# Altium PCB level_shifter_pcb.PcbDoc
Units mil, origin at the board's own origin, x right, y up, seen from the top; angles counter-clockwise.
Board outline 920 x 725 mil, 2 copper layers (Top Layer, Bottom Layer); 5 components, 5 nets, 11 pads, 0 vias.
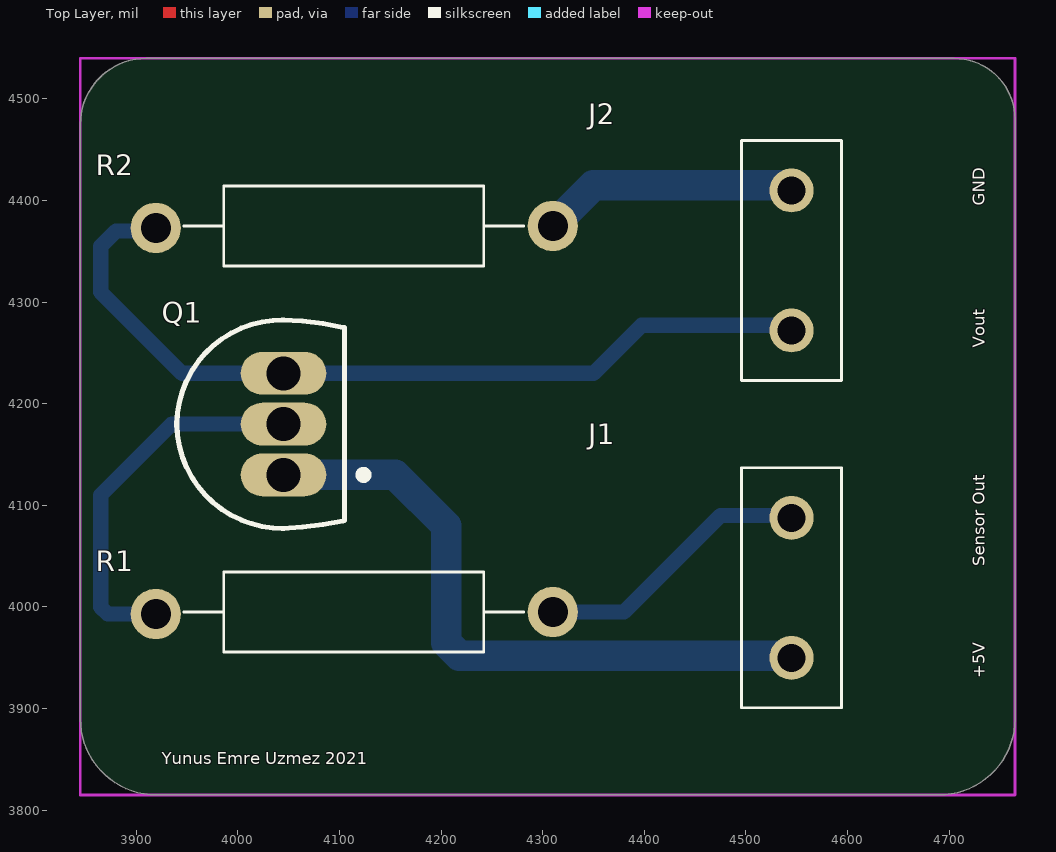
[diagram p0: Top Layer view]
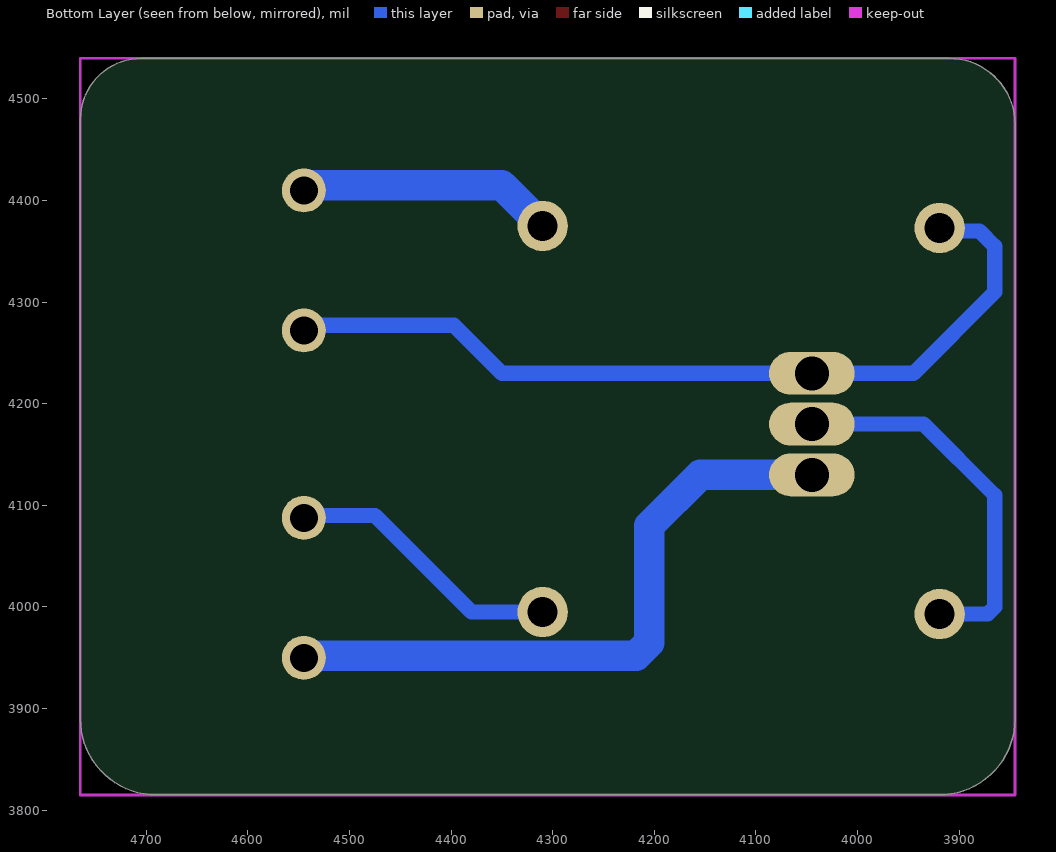
[diagram p1: Bottom Layer view, seen from below]
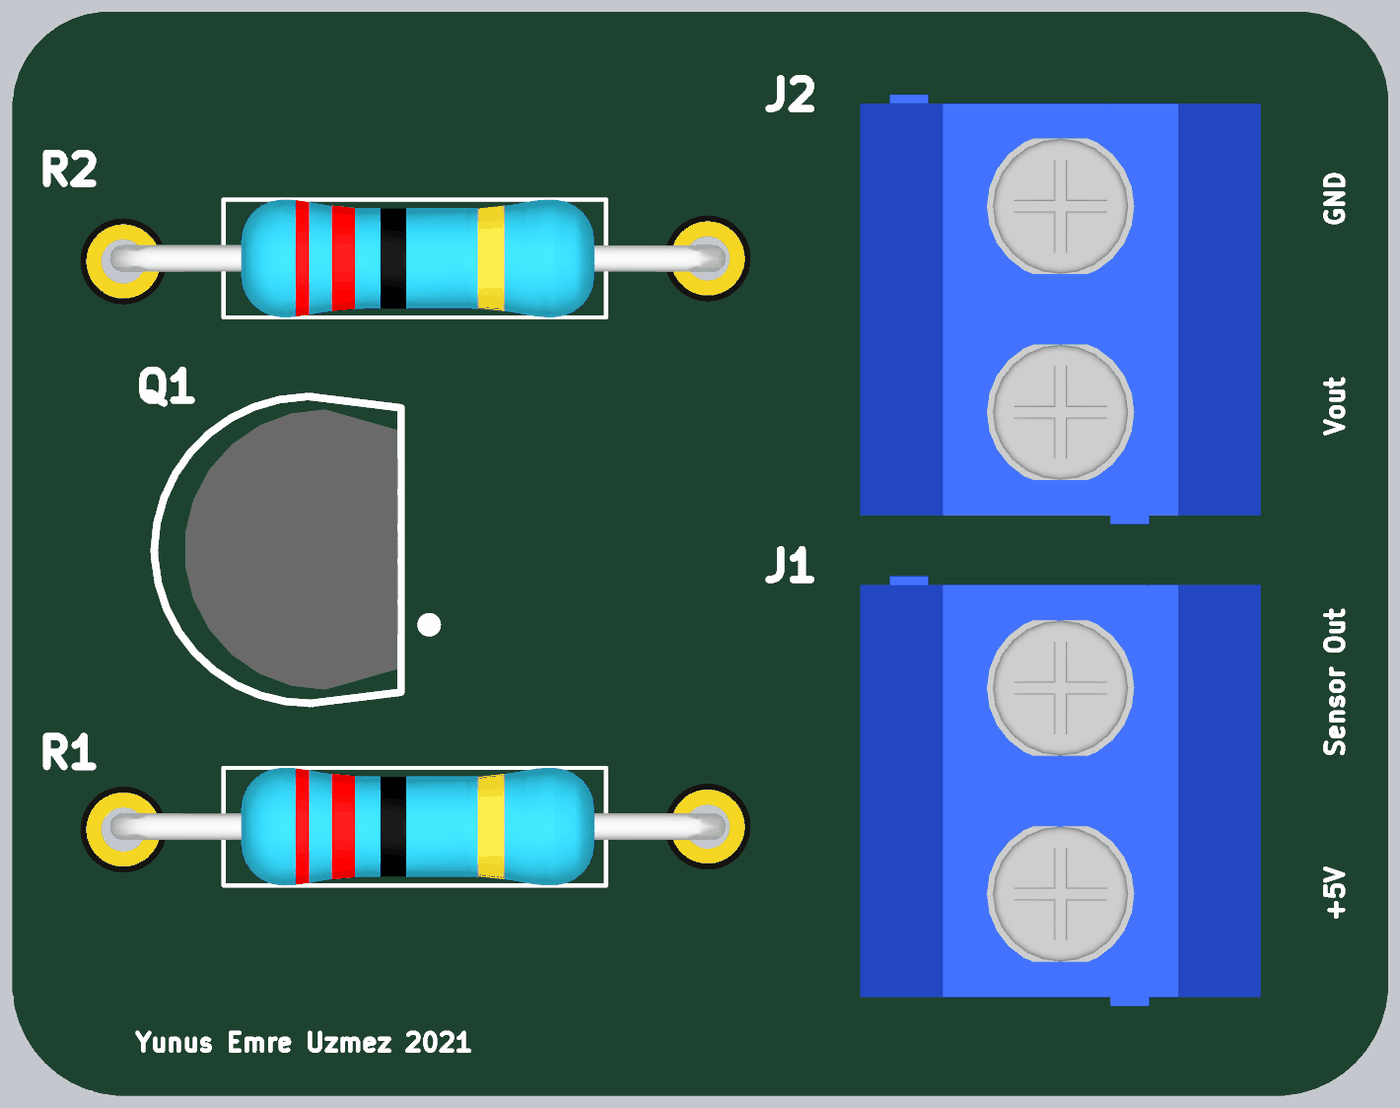
[diagram p2: 3D render of the assembled board from above, using the file's embedded part models]

## Layer stack, top to bottom
Top Solder: solder mask 0.4, Solder Resist, Dk 3.5
Top Layer: signal copper 1.4
Dielectric 1: dielectric 12.6, FR-4, Dk 4.8
Bottom Layer: signal copper 1.4
Bottom Solder: solder mask 0.4, Solder Resist, Dk 3.5

## Board outline
3920,3815 4690,3815 ccw(c4690,3890) 4765,3890 4765,4480 ccw(c4705,4480) 4705,4540 3910,4540 ccw(c3910,4475) 3845,4475 3845,3890 ccw(c3920,3890)

## Design rules (kind name [scope] priority, off if disabled: settings)
Clearance [All] p1: gap=1 ignorepadtopadclearanceinfootprint=FALSE except(0: Arc-Hole Track-Hole SMDPad-Hole THPad-Hole Via-Hole Fill-Hole Poly-Hole Region-Hole Text-Hole)
HoleToHoleClearance [All] p1: gap=0 allowstackedmicrovias=TRUE
PolygonConnect [All] p1: connectstyle=Relief reliefconductorwidth=10 reliefentries=4 polygonreliefangle="90 Angle" airgapwidth=10
RoutingVias [All] p1: holewidth=28 width=50 viastyle="Through Hole" minholewidth=28 minwidth=50 maxholewidth=28 maxwidth=50
SilkToSilkClearance [All] p1: silktosilkclearance=1
SilkToSolderMaskClearance [IsPad] p1: minsilkscreentomaskgap=1 clearancetoexposedcopper=TRUE
SolderMaskExpansion [All] p1: expansion=4
Width [All] p1: maxlimit=100 minlimit=10 preferedwidth=15 minimp=50.000000 maximp=50.000000 favimp=50.000000
27 further rules are at their usual default settings.

## Components (designator, comment, footprint, x,y, rotation, side; value= is the part's Value field where it differs from the comment)
J1 "Terminal Block 1x2" "TERMINAL BLOCK 1X2" 4530.94,4012.8 r90 top
J2 "Terminal Block 1x2" "TERMINAL BLOCK 1X2" 4530.94,4335 r90 top
Q1 "BC327" TO-92-3 4047.36,4180 r90 top
R1 "Resistor 10k" "THT RESISTOR" 4098.74,4116.26 r180 top value=10k
R2 "Resistor 10k" "THT RESISTOR" 4098.74,4496.26 r180 top value=10k

## Footprints (in the part's own frame and the unit in brackets; to place one, negate y for a bottom-side part, rotate by r counter-clockwise, add the part's x,y. Pads: shape width x height; smd on the part's side, far side on the other; paste and mask are expansions set on the pad)
"TERMINAL BLOCK 1X2" [mm]
  round 1.1 hole 0.7: 1(-1.595,-0.357) 2(1.905,-0.357)
  silkscreen extent -2.85,-1.61 3.16,0.89, body extent -3.5,-3.78 3.8,3.02, height 8.4
"THT RESISTOR" [mm]
  round 1.258 hole 0.75: 1(-5.366,3.08) 2(4.559,3.13)
  silkscreen extent -4.64,2.08 3.86,4.08, body extent -5.67,2.08 4.78,4.08, height 2.6
TO-92-3 [mm]
  oval 1.07x2.14 hole 0.85: B(0,0.06) C(1.27,0.06) E(-1.27,0.06)
  silkscreen extent -2.61,-2.04 2.61,2.73, body extent -2.37,-1.41 2.39,2.22, height 8.63

## Part data
J1 J2: "Fixed Terminal Block , screw type, 5.08 , horizontal, 2 poles, CUI Blue, slotted screw, PCB mount"
Q1: "Bipolar (BJT) Transistor PNP 45V 800mA 100MHz 625mW Through Hole TO-92-3"
R1 R2: "Carbon Film Resistor Through Hole 10k"

## Nets (pads, with @x,y where several pads share a name; then routed paths per layer and width w, separated by ;. In a path a pad name is that pad's centre, name@x,y a point inside that pad or via, vN(x,y) a via of type N, cw(c..) or ccw(c..) an arc to the next point about the centre after c; other vN are vias at no path point)
+5: J1.1 Q1.E | length 640.1
  Bottom Layer w30: Q1.E 4155,4130 4205,4080 4205,3965 4217.8,3952.2 J1.1@4544.06,3952.2
GND: J2.2 R2.1 | length 250.6
  Bottom Layer w30: R2.1 4350,4415 J2.2@4544.06,4415
NetQ1_B: Q1.B R1.2 | length 376.1
  Bottom Layer w15: R1.2 3871.97,3993.03 3865,4000 3865,4110 3935,4180 Q1.B
Sensor_Out: J1.2 R1.1 | length 273.4
  Bottom Layer w15: R1.1 4380,3995 4475,4090 J1.2@4544.06,4090
Vout: J2.1 Q1.C R2.2 | length 838.5
  Bottom Layer w15: R2.2 3916.22,4370 3880,4370 3865,4355 3865,4310 3945,4230 Q1.C 4350,4230 4397.2,4277.2 J2.1@4544.06,4277.2

## Keep-outs
Keep-Out Layer:
  lines w2.76: 3845,3815 4765,3815 4765,3920 4765,4275 4765,4540 4200,4540 3845,4540 3845,3815

## Silkscreen, mask and mechanical layers (free items; w line width, h text height)
Top Overlay:
  text "GND" at 4735,4395 h11.81 r90
  text "Vout" at 4735,4255 h11.81 r90
  text "Sensor Out" at 4735,4040 h11.81 r90
  text "+5V" at 4735,3930 h11.81 r90
  text "Yunus Emre Uzmez 2021" at 3925,3845 h11.81